# Altium PCB PCB3.PcbDoc
Units mm, origin at the board's own origin, x right, y up, seen from the top; angles counter-clockwise.
Board outline 100 x 50.04 mm, 2 copper layers (Top Layer, Bottom Layer); 23 components, 29 nets, 82 pads, 0 vias.
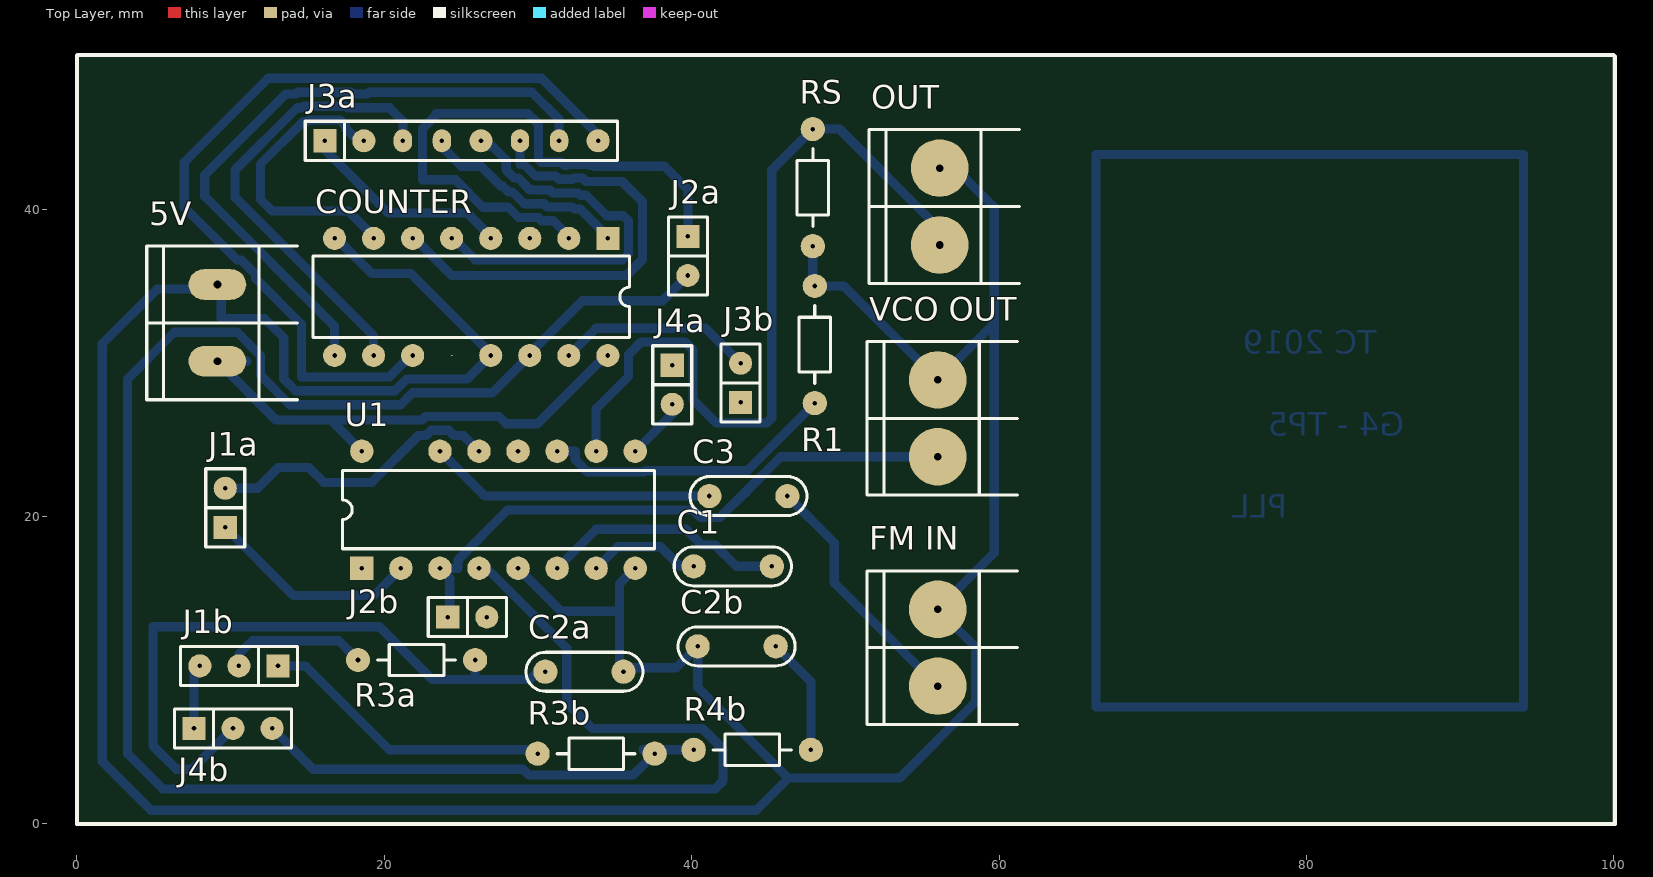
[diagram p0: Top Layer view]
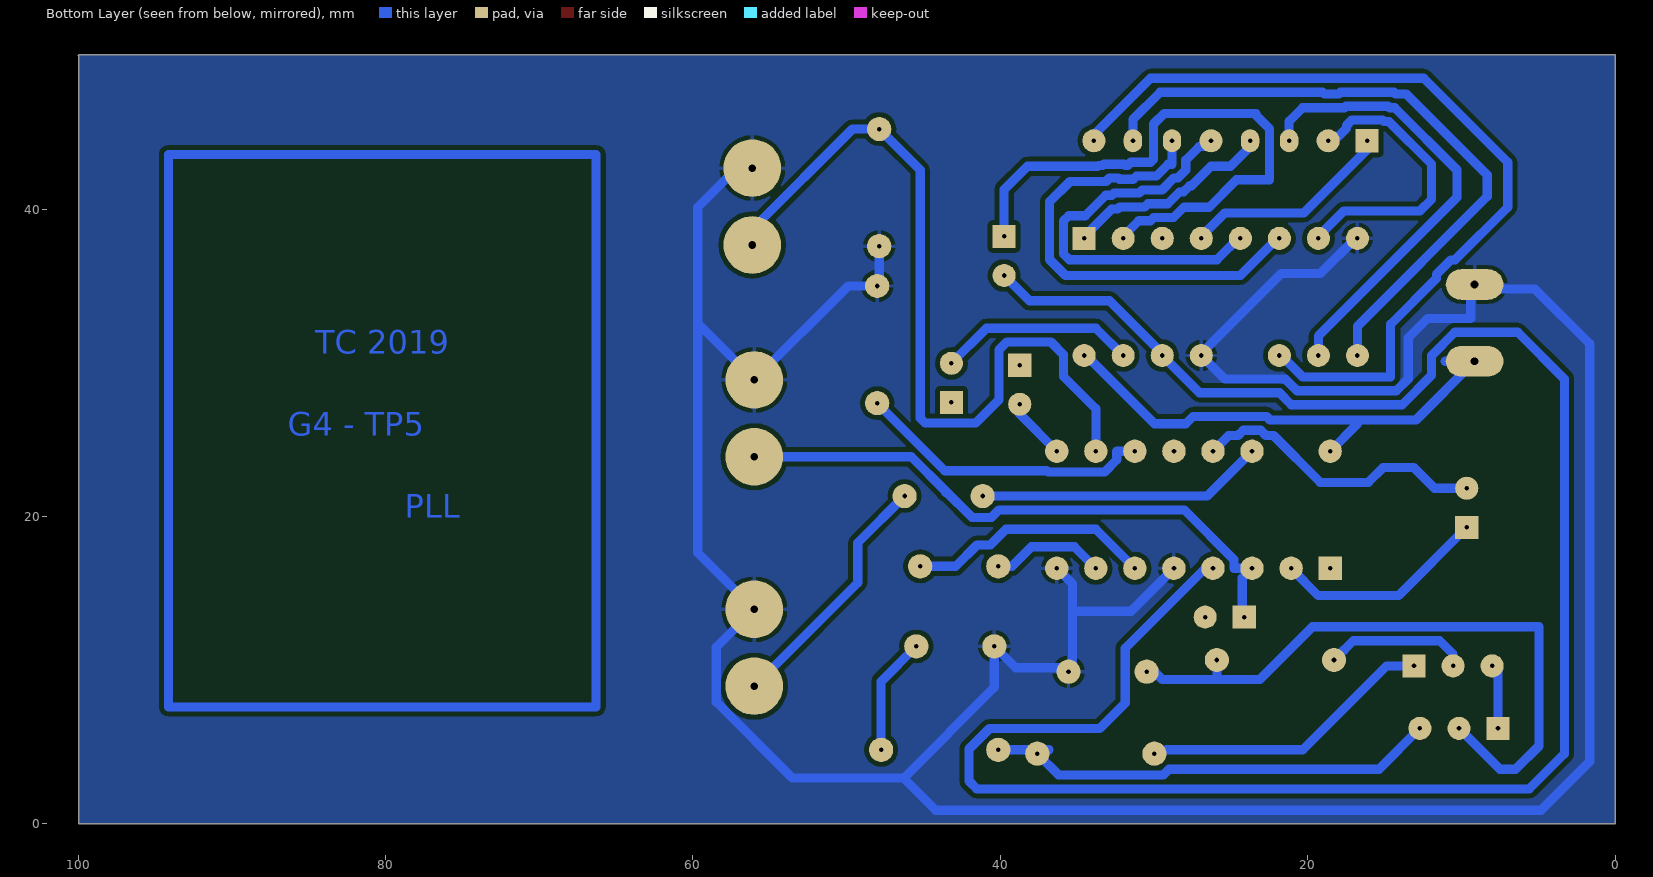
[diagram p1: Bottom Layer view, seen from below]

## Layer stack, top to bottom
Top Solder: solder mask 0.0102, Solder Resist, Dk 3.5
Top Layer: signal copper 0.0356
Dielectric 1: dielectric 0.32, FR-4, Dk 4.8
Bottom Layer: signal copper 0.0356
Bottom Solder: solder mask 0.0102, Solder Resist, Dk 3.5

## Board outline
0,0 99.949,0 99.949,49.949 100,50 99.962,50.038 0,50.038

## Design rules (kind name [scope] priority, off if disabled: settings)
Clearance [All] p1: gap=0.3 ignorepadtopadclearanceinfootprint=FALSE
PolygonConnect [All] p1: connectstyle=Relief reliefconductorwidth=0.254 reliefentries=4 polygonreliefangle="90 Angle" airgapwidth=0.254
RoutingVias [All] p1: holewidth=0.711 width=1.27 viastyle="Through Hole" minholewidth=0.711 minwidth=1.27 maxholewidth=0.711 maxwidth=1.27
SolderMaskExpansion [All] p1: expansion=0.102
Width [All] p1: maxlimit=0.6 minlimit=0.6 preferedwidth=0.6
30 further rules are at their usual default settings.

## Components (designator, comment, footprint, x,y, rotation, side; value= is the part's Value field where it differs from the comment)
5V "VCC" BORNERA2#1 9.144,32.599 r0 top
C1 "70pF" CAP200 42.672,16.764 r180 top
C2a "0.1uF" CAP200 33.02,9.906 r0 top
C2b "68pF" CAP200 42.926,11.557 r180 top
C3 "10nF" CAP200 43.688,21.336 r180 top
COUNTER "SN54HC4017J" J016 25.654,34.29 r180 top
"FM IN" "BORNERA 2" BORNERA2#2 56.007,11.47 r0 top
J1a "COMP" SIP2 9.652,20.574 r90 top
J1b "FILT" SIP3 10.541,10.287 r180 top
J2a "DIV" SIP2 39.751,36.957 r270 top
J2b "CON2" SIP2 25.4,13.462 r0 top
J3a "N" SIP8 16.129,44.45 r0 top
J3b "CON2" SIP2 43.18,28.702 r90 top
J4a "CON2" SIP2 38.735,28.575 r270 top
J4b "CON3" SIP3 10.16,6.223 r0 top
OUT "BORNERA 2" BORNERA2#2 56.134,40.172 r0 top
R1 "10k" RES300 48.006,35.002 r270 top
R3a "100k" RES300 18.288,10.668 r0 top
R3b "100k" RES300 29.972,4.572 r0 top
R4b "5k" RES300 47.752,4.826 r180 top
RS "100k" RES300 47.879,37.592 r90 top
U1 "CD4046B" DIP16 18.542,16.637 r90 top
"VCO OUT" "BORNERA 2" BORNERA2#2 56.007,26.392 r0 top

## Footprints (in the part's own frame and the unit in brackets; to place one, negate y for a bottom-side part, rotate by r counter-clockwise, add the part's x,y. Pads: shape width x height; smd on the part's side, far side on the other; paste and mask are expansions set on the pad)
BORNERA2#1 [mm] "Bornera con Tornillos 5mm separación"
  oval 3.75x2 hole 0.5: 1(0,2.5) 2(0,-2.5)
  silkscreen extent -4.6,-5 5.2,5, body extent -3.76,-4.89 3.94,5.61, height 10
BORNERA2#2 [mm] "Bornera con Tornillos 5mm separación"
  round 3.75 hole 0.5: 1(0,2.5) 2(0,-2.5)
  silkscreen extent -4.6,-5 5.2,5, body extent -3.76,-4.89 3.94,5.61, height 10
CAP200 [mil]
  round 62 hole 11.81: 1(-100,0) 2(100,0)
  silkscreen extent -150,-50 150,50, body extent -110,-46 110,44, height 246
DIP16 [mil]
  rect 60x60 hole 11.81: 1(0,0)
  round 60 hole 11.81: 2(0,-100) 3(0,-200) 4(0,-300) 5(0,-400) 6(0,-500) 7(0,-600) 8(0,-700) 9(300,-700) 10(300,-600) 11(300,-500) 12(300,-400) 13(300,-300) 14(300,-200) 16(300,0)
  round 0.04 smd: 15(300,-100)
  silkscreen extent 50,-750 250,50, body extent -3,-744 307,44, height 78
J016 [mm] "DIP; 16 Leads; Row Spacing 7.62 mm; Pitch 2.54 mm"
  rect 1.5x1.5 hole 0.3: 1(-8.89,-3.81)
  round 1.5 hole 0.3: 2(-6.35,-3.81) 3(-3.81,-3.81) 4(-1.27,-3.81) 5(1.27,-3.81) 6(3.81,-3.81) 7(6.35,-3.81) 8(8.89,-3.81) 9(8.89,3.81) 10(6.35,3.81) 11(3.81,3.81) 13(-1.27,3.81) 14(-3.81,3.81) 15(-6.35,3.81) 16(-8.89,3.81)
  oval 0.1x0.01 smd: 12(1.27,3.81)
  silkscreen extent -10.3,-2.65 10.3,2.65
RES300 [mil]
  round 62 hole 11.81: 1(0,0) 2(300,0)
  silkscreen extent 50,-40 250,40, body extent -10,-38 310,38, height 79
SIP2 [mm]
  rect 1.5x1.5 hole 0.3: 1(-1.27,0)
  round 1.5 hole 0.3: 2(1.27,0)
  silkscreen extent -2.54,-1.27 2.54,1.27
SIP3 [mm]
  rect 1.5x1.5 hole 0.3: 1(-2.54,0)
  round 1.5 hole 0.3: 2(0,0) 3(2.54,0)
  silkscreen extent -3.81,-1.27 3.81,1.27, body extent -3.81,-1.3 3.81,1.24, height 8.38
SIP8 [mm]
  rect 1.5x1.5 hole 0.3: 1(0,0)
  round 1.5 hole 0.3: 2(2.54,0) 5(10.16,0) 8(17.78,0)
  oval 1.2x1.5 hole 0.3: 3(5.08,0) 4(7.62,0) 6(12.7,0) 7(15.24,0)
  silkscreen extent -1.27,-1.27 19.05,1.27, body extent -1.27,-1.27 19.05,1.27, height 2.54

## Part data
5V: library part "BORNERA 2"
C1 C2a C2b C3: library part CAP
COUNTER: "Decade Counter / Divider", ComponentLink1Description="Manufacturer Link", ComponentLink1URL=http://www.ti.com/, ComponentLink2Description=Datasheet, ComponentLink2URL=http://www-s.ti.com/sc/ds/sn74hc4017.pdf, DatasheetVersion=Jun-1989, LatestRevisionDate=04-Mar-2005, LatestRevisionNote="Stylized 3D Model Added.", PackageDescription="DIP; 16 Leads; Row Spacing 7.62 mm; Pitch 2.54 mm", PackageReference=J016, PackageVersion=Jun-1999, Published=8-Jun-2000, Publisher="Altium Limited"
J1a J2a: library part CON2
J1b: library part CON3
J3a: library part CON8
R1 R3a R3b R4b RS: library part RES
U1: library part IC_DIP16

## Nets (pads, with @x,y where several pads share a name; then routed paths per layer and width w, separated by ;. In a path a pad name is that pad's centre, name@x,y a point inside that pad or via, vN(x,y) a via of type N, cw(c..) or ccw(c..) an arc to the next point about the centre after c; other vN are vias at no path point)
GND: 5V.1 "FM IN.1" "VCO OUT.1" C2a.2 C2b.2 COUNTER.8 COUNTER.13 OUT.1 R1.1 RS.1 U1.5 U1.8 | length 224.6
  Bottom Layer w0.6: COUNTER.8@16.764,38.227 19.177,35.814 21.717,35.814 COUNTER.13@26.924,30.607 ; COUNTER.13 25.4,28.956 21.466,28.956 20.693,28.183 14.232,28.183 13.459,28.956 13.459,31.626 12.192,32.893 9.398,32.893 9.398,34.845 5V.1 8.843,34.798 5.207,34.798 1.651,31.242 1.651,4.064 4.826,0.889 44.196,0.889 46.291,2.984 ; U1.5 31.496,13.843 35.306,13.843 ; U1.8 35.306,15.621 35.306,13.843 ; RS.1 47.879,35.129 R1.1 49.897,35.002 56.007,28.892 59.627,32.512 59.69,32.512 ; OUT.1@56.007,43.815 59.69,40.132 59.69,32.512 ; 35.306,13.843 35.306,10.16 38.989,10.16 C2b.2 40.386,8.89 46.291,2.984 ; 46.291,2.984 53.522,2.984 58.482,7.945 58.482,11.495 56.007,13.97 59.69,17.653 59.69,32.512
NetC1_1: C1.1 U1.6 | length 16
  Bottom Layer w0.6: U1.6 33.782,19.177 39.624,19.177 40.65,18.151 41.519,18.151 42.907,16.764 C1.1
NetC1_2: C1.2 U1.7 | length 7.6
  Bottom Layer w0.6: U1.7 35.179,18.034 37.973,18.034 39.243,16.764 C1.2 C1.2@40.005,16.891
NetC2a_1: C2a.1 J4b.2 R3a.2 | length 43
  Bottom Layer w0.6: J4b.2 7.493,3.556 6.477,3.556 4.953,5.08 4.953,12.827 19.685,12.827 23.114,9.398 25.908,9.398 ; R3a.2 25.908,9.398 ; C2a.1@30.226,10.16 29.464,9.398 25.908,9.398
NetC2b_1: C2b.1 R4b.1 | length 7.7
  Bottom Layer w0.6: C2b.1 47.752,9.271 R4b.1
NetC3_1: "FM IN.2" C3.1 | length 16.4
  Bottom Layer w0.6: C3.1 49.276,18.288 49.276,15.701 56.007,8.97
NetC3_2: C3.2 U1.14 | length 18.7
  Bottom Layer w0.6: U1.14 26.543,21.336 C3.2
NetCOUNTER_1: COUNTER.1 J3a.4 | length 13.2
  Bottom Layer w0.6: J3a.4@23.749,44.069 25.019,42.799 26.286,42.799 27.556,41.529 27.68,41.529 28.083,41.126 28.335,41.126 29.111,40.35 30.396,40.35 30.6,40.146 32.231,40.146 32.372,40.005 32.766,40.005 COUNTER.1@34.544,38.227
NetCOUNTER_2: COUNTER.2 J2a.1 | length 38.8
  Bottom Layer w0.6: COUNTER.2 32.004,38.227 30.985,39.246 30.227,39.246 30.023,39.45 28.738,39.45 28.056,40.132 26.413,40.132 24.635,41.91 22.479,41.91 22.479,45.212 23.368,46.101 23.368,46.228 29.337,46.228 30.029,45.536 30.029,43.25 30.229,43.05 31.514,43.05 31.718,42.846 31.866,42.846 31.946,42.926 33.27,42.926 33.35,42.846 33.608,42.846 33.655,42.799 38.227,42.799 39.751,41.275 J2a.1
NetCOUNTER_4: COUNTER.4 J3a.1 | length 13.3
  Bottom Layer w0.6: J3a.1@16.129,44.069 16.129,43.879 20.257,39.751 25.4,39.751 COUNTER.4@26.924,38.227
NetCOUNTER_5: COUNTER.5 J3a.5 | length 26.4
  Bottom Layer w0.6: COUNTER.5@24.384,38.227 25.908,36.703 35.496,36.703 35.894,37.101 35.894,39.226 35.543,39.577 34.467,39.577 33.139,40.905 32.745,40.905 32.604,41.046 30.973,41.046 30.769,41.25 29.483,41.25 28.707,42.026 28.456,42.026 27.929,42.553 27.929,43.191 27.051,44.069 J3a.5@26.289,44.069
NetCOUNTER_6: COUNTER.6 J3a.6 | length 30.4
  Bottom Layer w0.6: COUNTER.6@21.844,38.227 24.384,35.687 35.752,35.687 36.794,36.729 36.794,40.477 35.466,41.805 33.118,41.805 32.897,42.026 32.319,42.026 32.239,41.946 31.346,41.946 31.142,42.15 29.856,42.15 29.08,42.926 28.829,42.926 J3a.6@28.829,44.069
NetCOUNTER_7: COUNTER.7 J3a.2 | length 19.4
  Bottom Layer w0.6: J3a.2@18.669,44.069 17.479,45.259 17.479,45.449 17.128,45.8 15.13,45.8 15.028,45.698 14.713,45.698 11.938,42.923 11.938,40.64 12.7,39.878 17.653,39.878 COUNTER.7@19.304,38.227
NetCOUNTER_9: COUNTER.9 J3a.7 | length 43.1
  Bottom Layer w0.6: COUNTER.9 16.764,32.385 8.319,40.831 8.319,42.227 13.589,47.498 14.283,47.498 14.385,47.6 17.873,47.6 17.975,47.498 18.916,47.498 19.032,47.614 29.602,47.614 31.369,45.847 J3a.7 J3a.7@31.369,44.069
NetCOUNTER_10: COUNTER.10 J3a.3 | length 30.5
  Bottom Layer w0.6: COUNTER.10 19.304,31.75 10.287,40.767 10.287,42.545 14.34,46.598 14.656,46.598 14.758,46.7 17.5,46.7 17.602,46.598 20.331,46.598 21.209,45.72 J3a.3 J3a.3@21.209,44.069
NetCOUNTER_11: COUNTER.11 J3a.8 | length 56.6
  Bottom Layer w0.6: COUNTER.11@21.844,30.607 20.32,29.083 14.605,29.083 14.605,32.512 11.619,35.498 11.619,35.762 10.682,36.699 10.418,36.699 6.985,40.132 6.985,43.053 12.446,48.514 30.226,48.514 33.909,44.831 J3a.8 J3a.8@33.909,44.069
NetCOUNTER_14: COUNTER.14 J2a.2 U1.4 | length 132.7
  Bottom Layer w0.6: U1.4 26.67,16.637 31.877,11.43 31.877,7.874 33.538,6.213 40.707,6.213 42.037,4.883 42.037,2.794 41.528,2.285 5.589,2.285 3.302,4.572 3.302,28.953 6.342,31.993 10.428,31.993 11.949,30.472 11.949,29.193 13.859,27.283 21.066,27.283 21.839,28.056 27.04,28.056 COUNTER.14 ; COUNTER.14@29.464,30.607 32.893,34.036 38.1,34.036 J2a.2@39.497,35.433
NetCOUNTER_15: COUNTER.15 J3b.2 | length 12.9
  Bottom Layer w0.6: COUNTER.15 33.782,32.258 40.894,32.258 J3b.2
NetJ1a_1: J1a.1 U1.2 | length 14
  Bottom Layer w0.6: J1a.1 14.097,14.859 19.304,14.859 U1.2
NetJ1a_2: J1a.2 U1.13 | length 19.4
  Bottom Layer w0.6: J1a.2 11.748,21.844 13.098,23.194 15.096,23.194 16.065,22.225 19.177,22.225 22.225,25.273 22.712,25.273 23.058,25.619 24.186,25.619 24.532,25.273 25.146,25.273 U1.13
NetJ1b_1: J1b.1 R3b.1 | length 18.4
  Bottom Layer w0.6: J1b.1 14.859,10.287 20.32,4.826 29.21,4.826
NetJ1b_2: J1b.2 R3a.1 | length 9.1
  Bottom Layer w0.6: J1b.2 10.541,11.049 11.419,11.927 17.029,11.927 R3a.1@18.089,10.867
NetJ1b_3: J1b.3 J4b.1 | length 4.2
  Bottom Layer w0.6: J4b.1 7.62,9.906 J1b.3
NetJ2b_1: "VCO OUT.2" J2b.1 U1.3 | length 38.9
  Bottom Layer w0.6: 24.257,14.224 24.257,16.002 U1.3 24.8,16.637 24.8,17.201 28.035,20.436 40.086,20.436 40.573,19.949 41.845,19.949 43.561,21.664 ; 43.561,21.59 43.561,21.664 ; 56.007,23.892 45.789,23.892 43.561,21.664
NetJ4a_2: J4a.2 U1.9 | length 4
  Bottom Layer w0.6: U1.9 38.735,26.67 J4a.2
NetJ4b_3: J4b.3 R3b.2 R4b.2 | length 30
  Bottom Layer w0.6: J4b.3 15.367,3.556 29.026,3.556 29.397,3.185 36.205,3.185 R3b.2 ; 36.83,4.826 R4b.2
NetOUT_2: OUT.2 RS.2 U1.10 | length 51.7
  Bottom Layer w0.6: U1.10 33.782,27.018 35.894,29.13 35.894,30.549 36.703,31.358 39.571,31.358 40.085,30.844 40.085,27.606 41.609,26.082 44.878,26.082 45.212,26.416 45.212,42.545 RS.2 49.61,45.212 OUT.2@56.007,38.815
NetR1_2: R1.2 U1.11 | length 19.5
  Bottom Layer w0.6: U1.11 32.42,24.257 32.42,23.693 33.218,22.895 36.886,22.895 36.978,22.987 43.611,22.987 R1.2
VCC: 5V.2 COUNTER.16 U1.16 | length 33.8
  Bottom Layer w0.6: 11.049,30.099 5V.2 12.954,26.289 16.764,26.289 ; U1.16 16.764,26.035 16.764,26.289 ; COUNTER.16@34.544,30.607 29.972,26.035 27.94,26.035 27.456,26.519 22.685,26.519 22.455,26.289 16.764,26.289
pads on no net: COUNTER.3 COUNTER.12 J2b.2 J3b.1 J4a.1 U1.1 U1.12 U1.15
copper on no net: | length 127.5
  Bottom Layer w0.6: 66.294,7.62 66.294,43.561 94.107,43.561 94.107,7.62 66.294,7.62

## Polygon pours and split planes (outlines as drawn)
GND on Bottom Layer "Bottom Layer-No Net" (solid, remove dead copper, pour order 2): 0,0 0,50 100,50 100,0

## Other copper
Bottom Layer:
  text "TC 2019" at 84.583,30.607 h1.52
  text "G4 - TP5" at 86.36,25.273 h1.52
  text "PLL" at 78.742,19.939 h1.52

## Silkscreen, mask and mechanical layers (free items; w line width, h text height)
Top Overlay:
  lines w0.254: 0,0 0,50 0.038,50.038 99.962,50.038 100.076,49.924 100.076,0 0,0